# EAGLE board babymidiproto2_shield (EAGLE 6.5.0)
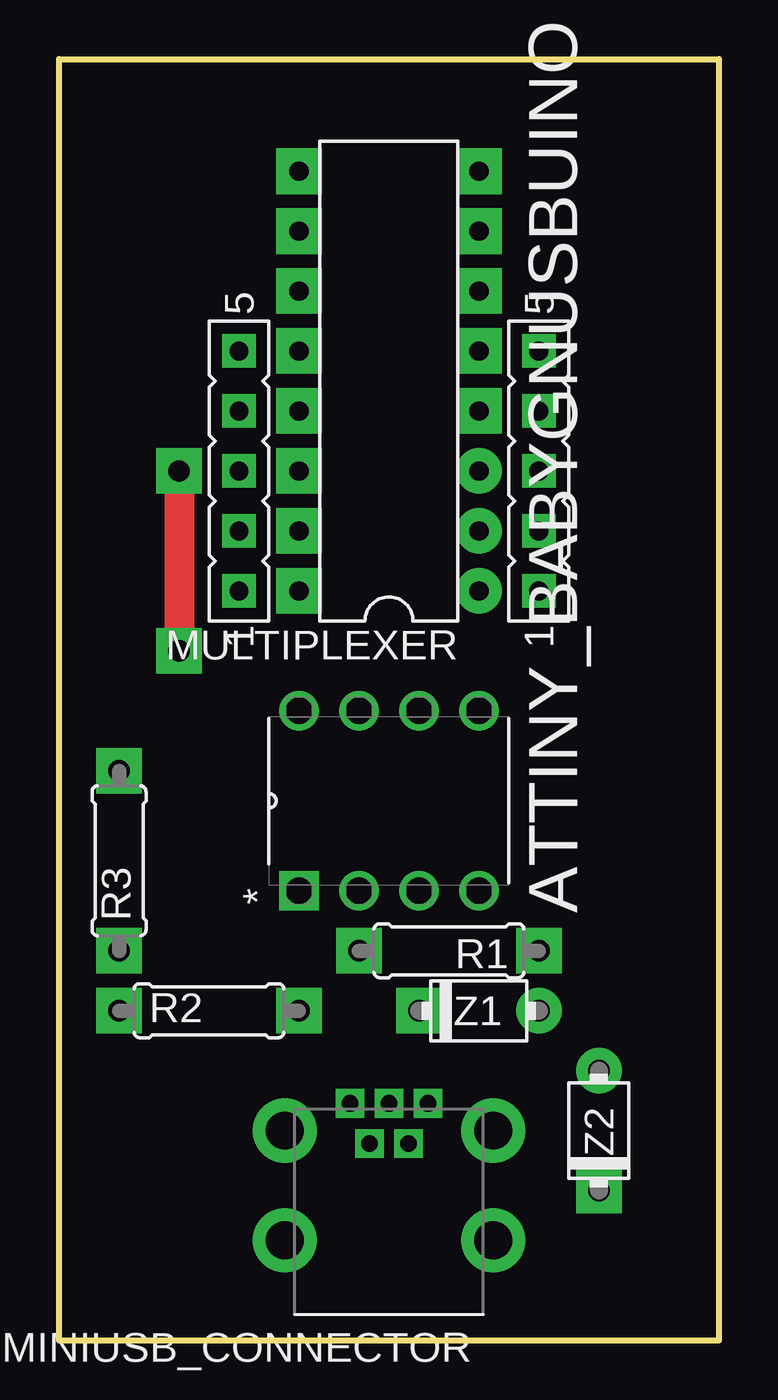
[diagram p0: board, top side]
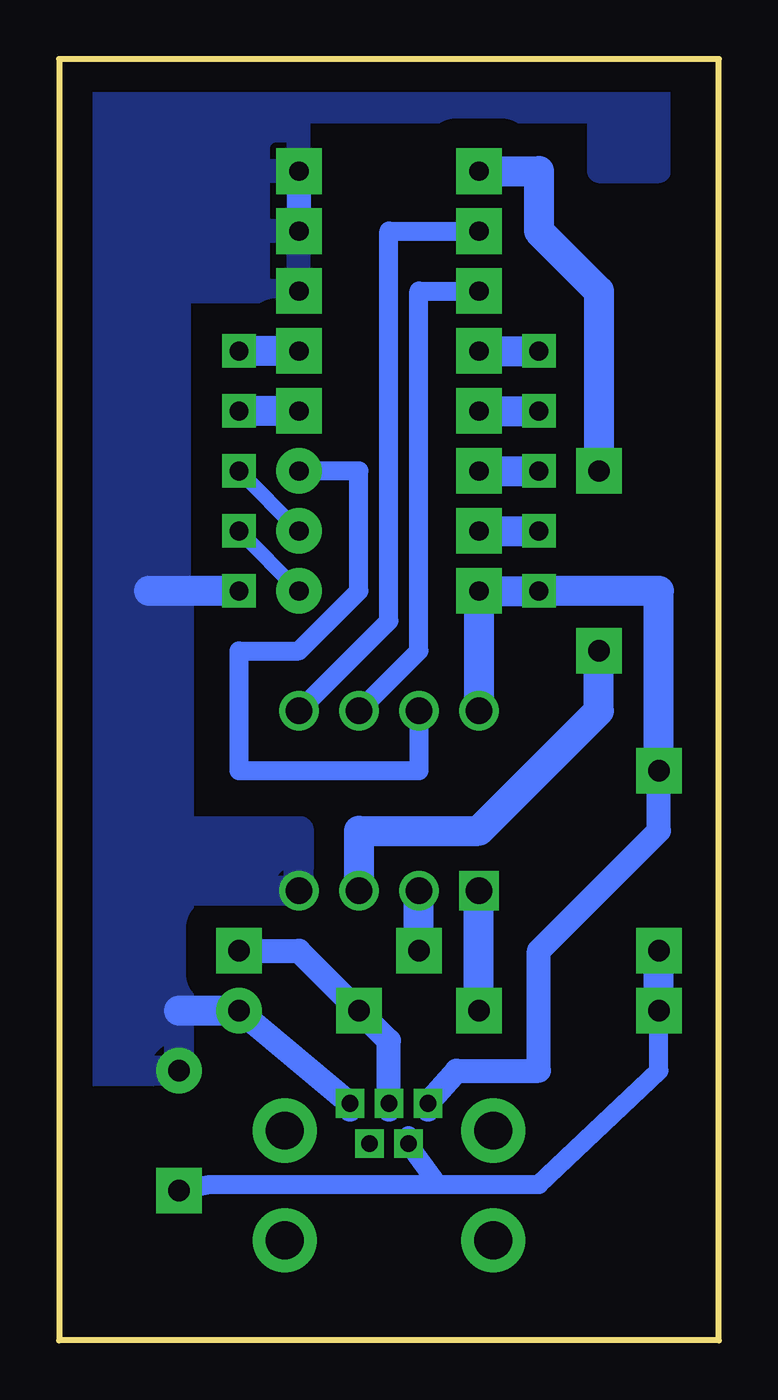
[diagram p1: board, bottom side, seen from below]

Size 27.94 x 54.28 mm. Coordinates in mm from the lower left corner, seen from the top.
Outline: 0,0 27.94,0 27.94,54.28 0,54.28 0,0
Copper layers (1*16): Top 0.035mm / dielectric 1.5mm / Bottom 0.035mm
Design rules "default": minimum track width 10mil, minimum drill 24mil, track to track 8mil, track to pad 8mil, pad to pad 8mil, via to via 8mil, smd to smd 8mil, copper to edge 40mil, drill to drill 8mil, minimum pad ring 10mil, minimum via ring 8mil, stop-mask expansion 4mil, vias tented up to drill 0mil, thermal gap 10mil

## Footprints (pad centres in the part's own frame; a part is rotated, then mirrored left to right if it is on the bottom)
DIP254P762X533-8 = drill 1.118 square: 1 -7.62,7.62 | drill 1.118: 2 -7.62,5.08; 3 -7.62,2.54; 4 -7.62,0; 5 0,0; 6 0,2.54; 7 0,5.08; 8 0,7.62
MINIUSB_DIP = drill 0.7 pad 0.813 square: 1 1.651,-3.694; 2 0.825,-1.986; 3 0,-3.694; 4 -0.825,-1.986; 5 -1.651,-3.694 | drill 1.6 pad 2.718: 6 -4.412,-2.54; 7 -4.412,2.11; 8 4.412,2.11; 9 4.412,-2.54
DIL16 = drill 0.813 pad 1.93: 1 -8.89,-3.81; 2 -6.35,-3.81; 3 -3.81,-3.81 | drill 0.813 pad 1.93 square: 4 -1.27,-3.81; 5 1.27,-3.81; 6 3.81,-3.81; 7 6.35,-3.81; 8 8.89,-3.81; 9 8.89,3.81; 10 6.35,3.81; 11 3.81,3.81; 12 1.27,3.81; 13 -1.27,3.81; 14 -3.81,3.81; 15 -6.35,3.81; 16 -8.89,3.81
FE05-1-SQUARE-BIG = drill 0.8 pad 1.422 square: 1 -5.08,0; 2 -2.54,0; 3 0,0; 4 2.54,0; 5 5.08,0
0703 = drill 0.9 pad 1.93 square: 1 -3.81,0; 2 3.81,0
DO41-2 = drill 0.9 pad 1.93: A 2.54,0 | drill 0.9 pad 1.93 square: C -2.54,0

## Placement (x,y rotation side)
ATTINY_BABYGNUSBUINO  TINY85-20-DIP  [DIP254P762X533-8]  17.78,26.67 90 top
MINIUSB_CONNECTOR  6510051365212  [MINIUSB_DIP]  13.97,6.35 180 top
MULTIPLEXER  4051N  [DIL16]  13.97,40.64 90 top
PINHEADER_1_4  [FE05-1-SQUARE-BIG]  7.62,36.83 90 top
PINHEADER_5_8  [FE05-1-SQUARE-BIG]  20.32,36.83 90 top
R1  68  [0703]  16.51,16.51 180 top
R2  68  [0703]  6.35,13.97 0 top
R3  1K5  [0703]  2.54,20.32 90 top
Z1  3.3V  [DO41-2]  17.78,13.97 0 top
Z2  3.3V  [DO41-2]  22.86,8.89 90 top

## Library data of the parts
ATTINY_BABYGNUSBUINO MINIUSB_CONNECTOR MULTIPLEXER PINHEADER_1_4 PINHEADER_5_8 R1-R3 Z1 Z2 = manticore-lib

## Nets
D_MINUS: ATTINY_BABYGNUSBUINO.1 R2.2
D_PLUS: ATTINY_BABYGNUSBUINO.2 R1.2
GND: ATTINY_BABYGNUSBUINO.4 MINIUSB_CONNECTOR.5 MULTIPLEXER.6 MULTIPLEXER.7 MULTIPLEXER.8 PINHEADER_5_8.1 Z1.A Z2.A
INPUT_1: MULTIPLEXER.12 PINHEADER_1_4.5
INPUT_2: MULTIPLEXER.13 PINHEADER_1_4.4
INPUT_3: MULTIPLEXER.14 PINHEADER_1_4.3
INPUT_4: MULTIPLEXER.15 PINHEADER_1_4.2
INPUT_5: MULTIPLEXER.5 PINHEADER_5_8.5
INPUT_6: MULTIPLEXER.4 PINHEADER_5_8.4
INPUT_7: MULTIPLEXER.2 PINHEADER_5_8.3
INPUT_8: MULTIPLEXER.1 PINHEADER_5_8.2
MULTIPLEXED_ANALOG_PIN: ATTINY_BABYGNUSBUINO.7 MULTIPLEXER.3
N$2: MINIUSB_CONNECTOR.3 R1.1 Z1.C
N$3: MINIUSB_CONNECTOR.2 R2.1 R3.1 Z2.C
S1: ATTINY_BABYGNUSBUINO.6 MULTIPLEXER.11
S2: ATTINY_BABYGNUSBUINO.5 MULTIPLEXER.10
S3: ATTINY_BABYGNUSBUINO.3 MULTIPLEXER.9
VCC: ATTINY_BABYGNUSBUINO.8 MINIUSB_CONNECTOR.1 MULTIPLEXER.16 PINHEADER_1_4.1 R3.2

## Tracks (layer width: path | path; a pad name or v marks a point on that pad's centre or on a via)
D_MINUS
  Bottom 1.27: R2.2 ATTINY_BABYGNUSBUINO.1
D_PLUS
  Bottom 1.27: R1.2 ATTINY_BABYGNUSBUINO.2
GND
  Bottom 0.254: 15.62,10.16 15.24,10.16 MINIUSB_CONNECTOR.5
  Bottom 1.016: MULTIPLEXER.8 MULTIPLEXER.7 | Z1.A MINIUSB_CONNECTOR.5 | 15.62,10.16 MINIUSB_CONNECTOR.5 | MINIUSB_CONNECTOR.5 15.62,9.78
  Bottom 1.27: Z1.A 22.86,13.97 | PINHEADER_5_8.1 24.13,31.75
  pour Bottom (isolate 1.27): 22.86,31.75 27.94,31.75 27.94,11.43 22.86,11.43
  pour Bottom: 17.78,19.05 25.4,19.05 22.86,21.59 17.78,21.59
  pour Bottom (isolate 1.27): 2.54,49.53 2.54,54.61 27.94,54.61 27.94,31.75 22.86,31.75 22.86,44.45 17.78,44.45 17.78,52.07 5.08,52.07 5.08,49.53
INPUT_1
  Bottom 1.27: MULTIPLEXER.12 PINHEADER_1_4.5
INPUT_2
  Bottom 1.27: MULTIPLEXER.13 PINHEADER_1_4.4
INPUT_3
  Bottom 1.27: MULTIPLEXER.14 PINHEADER_1_4.3
INPUT_4
  Bottom 1.27: MULTIPLEXER.15 PINHEADER_1_4.2
INPUT_5
  Bottom 1.27: MULTIPLEXER.5 PINHEADER_5_8.5
INPUT_6
  Bottom 1.27: MULTIPLEXER.4 PINHEADER_5_8.4
INPUT_7
  Bottom 0.61: MULTIPLEXER.2 PINHEADER_5_8.3
INPUT_8
  Bottom 0.61: MULTIPLEXER.1 PINHEADER_5_8.2
MULTIPLEXED_ANALOG_PIN
  Bottom 0.813: ATTINY_BABYGNUSBUINO.7 12.7,24.13 20.32,24.13 20.32,29.21 17.78,29.21 15.24,31.75 15.24,36.83 MULTIPLEXER.3
N$2
  Bottom 1.016: 13.97,9.78 MINIUSB_CONNECTOR.3 13.97,12.7 Z1.C 17.78,16.51 R1.1
N$3
  Bottom 0.813: Z2.C 21.59,6.6 11.9,6.6 | 11.9,6.6 7.62,6.6 2.54,11.43 R2.1 | MINIUSB_CONNECTOR.2 11.9,6.6
  Bottom 1.27: R2.1 R3.1
N$27
  Bottom 0.813: 13.14,8.34 13.14,8.69
S1
  Bottom 0.813: MULTIPLEXER.11 12.7,44.45 12.7,29.21 ATTINY_BABYGNUSBUINO.6
S2
  Bottom 0.813: MULTIPLEXER.10 13.97,46.99 13.97,30.48 ATTINY_BABYGNUSBUINO.5
S3  (via drill 0.9 pad 1.93)
  Top 1.27: v5.08,36.83 v5.08,29.21
  Bottom 1.27: MULTIPLEXER.9 7.62,49.53 7.62,46.99 5.08,44.45 v5.08,36.83 | v5.08,29.21 5.08,26.67 10.16,21.59 15.24,21.59 ATTINY_BABYGNUSBUINO.3
VCC
  Bottom 1.016: R3.2 2.54,21.59 7.62,16.51 7.62,11.43 11.1,11.43 MINIUSB_CONNECTOR.1 12.32,9.78
  Bottom 1.27: R3.2 2.54,31.75 PINHEADER_1_4.1 MULTIPLEXER.16 ATTINY_BABYGNUSBUINO.8